# Altium PCB Layup Test Structure.PcbDoc
Units mil, origin at the board's own origin, x right, y up, seen from the top; angles counter-clockwise.
Board outline not stored, 3 copper layers (Top Layer, Mid-Layer 2, Bottom Layer); 1 components, 0 nets, 0 pads, 0 vias.
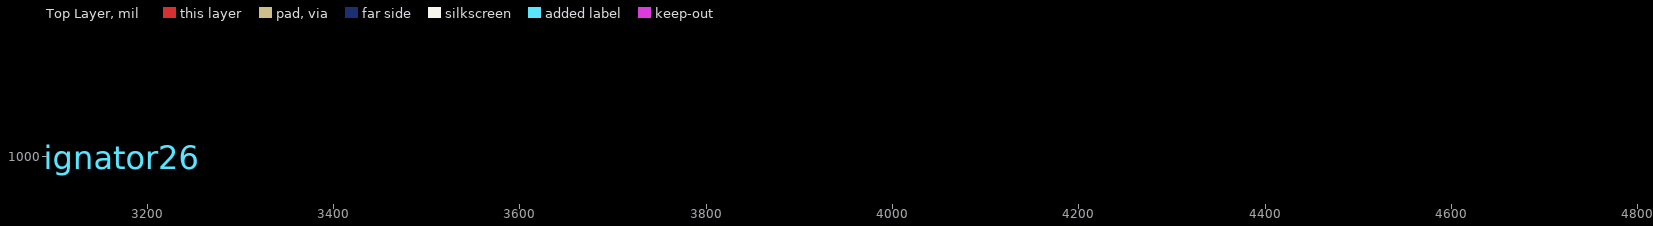
[diagram p0: Top Layer view]
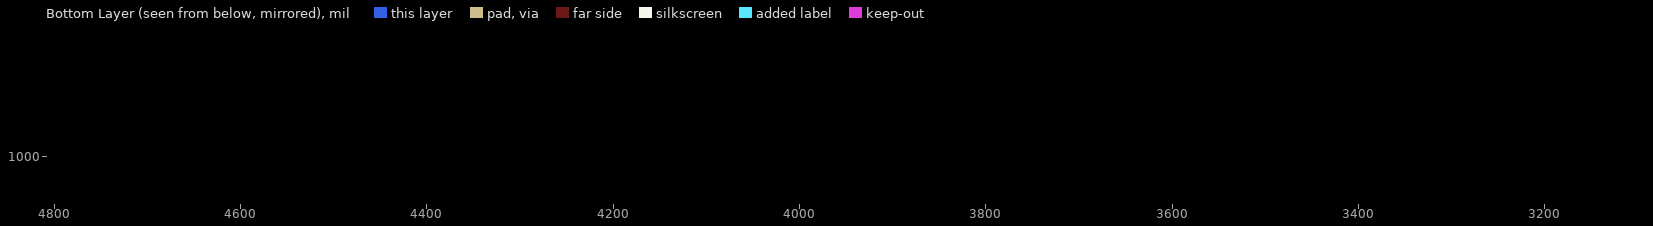
[diagram p1: Bottom Layer view, seen from below]
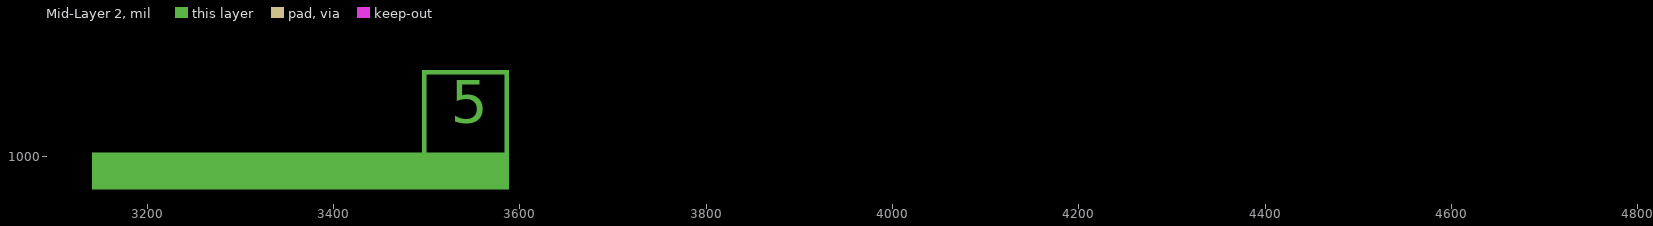
[diagram p2: Mid-Layer 2]

## Layer stack, top to bottom
Top Solder: solder mask 0.4, Solder Resist, Dk 3.5
Top Layer: signal copper 1.4
Dielectric 1: dielectric 12.6, FR-4, Dk 4.8
Mid-Layer 2: signal copper 1.4
Dielectric2: dielectric 12.6, FR-4, Dk 4.8
Bottom Layer: signal copper 1.4
Bottom Solder: solder mask 0.4, Solder Resist, Dk 3.5

## Components (designator, comment, footprint, x,y, rotation, side; value= is the part's Value field where it differs from the comment)
Designator26 "Comment" SIGNAL-5 3140.47,999.76 r0 top

## Footprints (in the part's own frame and the unit in brackets; to place one, negate y for a bottom-side part, rotate by r counter-clockwise, add the part's x,y. Pads: shape width x height; smd on the part's side, far side on the other; paste and mask are expansions set on the pad)
SIGNAL-5 [mil]
  Mid-Layer 2 region: 359.25,93.5 354.33,93.5 354.33,0 359.25,0
  Mid-Layer 2 region: 0,4.92 0,-35 447.84,-35 447.84,4.92
  Mid-Layer 2 region: 447.83,93.5 442.91,93.5 442.91,0 447.83,0
  Mid-Layer 2 region: 447.83,88.58 447.83,93.5 354.33,93.5 354.33,88.58
  Mid-Layer 2 region: 442.91,0 447.83,0 447.83,93.5 442.91,93.5
  Mid-Layer 2 pour cut-out: -4.92,98.43 -4.92,-4.92 1624.02,-4.92 1624.02,98.43

## Nets (pads, with @x,y where several pads share a name; then routed paths per layer and width w, separated by ;. In a path a pad name is that pad's centre, name@x,y a point inside that pad or via, vN(x,y) a via of type N, cw(c..) or ccw(c..) an arc to the next point about the centre after c; other vN are vias at no path point)

## Text inside footprints (layer, text, board x,y; h text height)
Designator26: Mid-Layer 2 "5" at 3525.47,1021.42 h78.74